# Altium PCB endpanel_back.PcbDoc
Units mm, origin at the board's own origin, x right, y up, seen from the top; angles counter-clockwise.
Board outline 86.5 x 29 mm, 2 copper layers (Top Layer, Bottom Layer); 1 components, 0 nets, 0 pads, 0 vias.
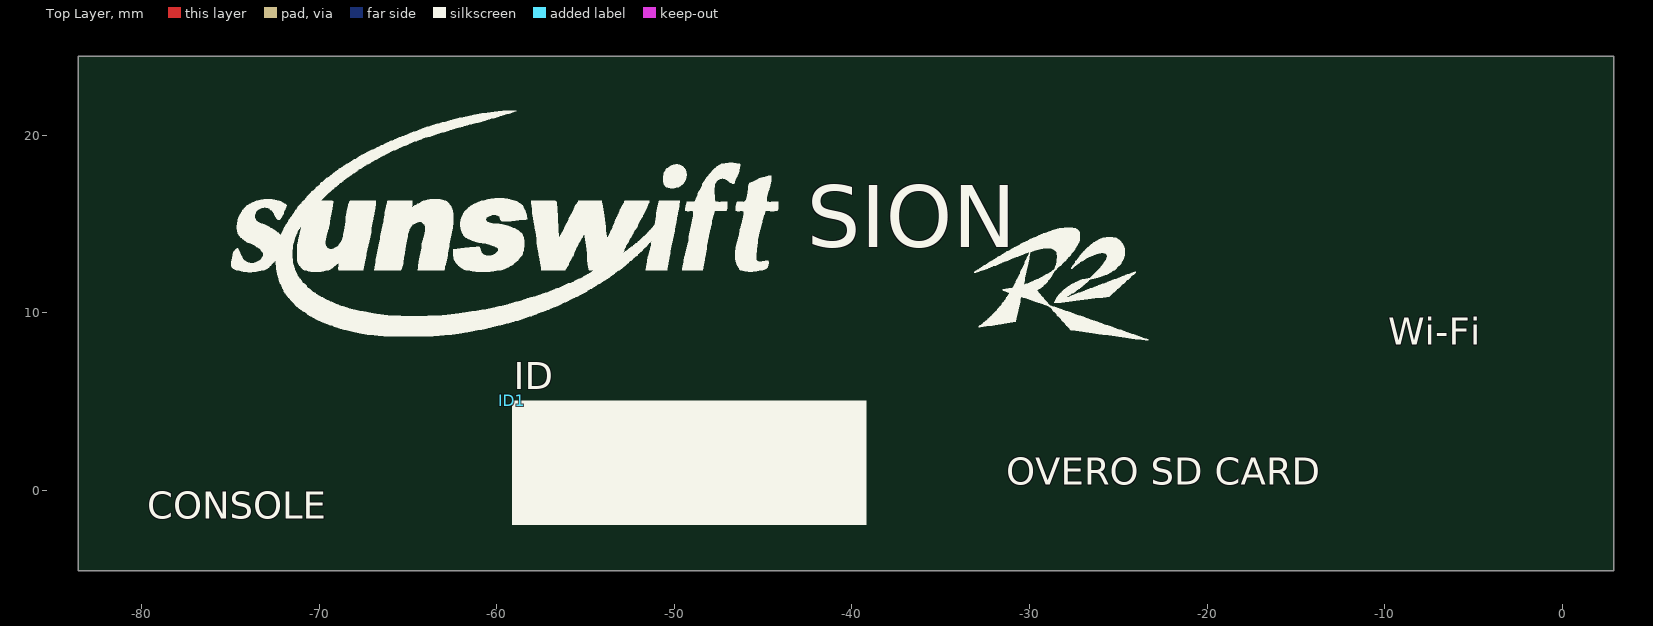
[diagram p0: Top Layer view]
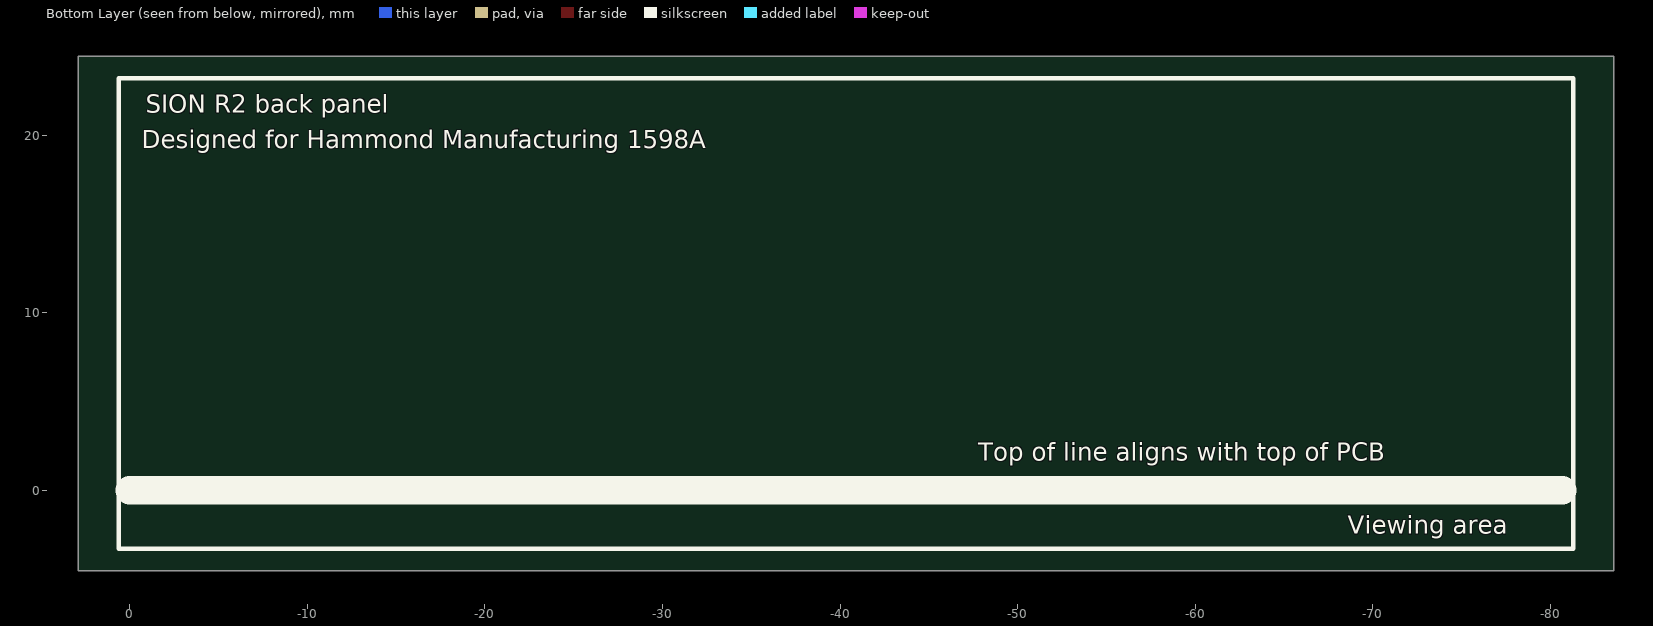
[diagram p1: Bottom Layer view, seen from below]

## Layer stack, top to bottom
Top Layer: signal copper 0.0356
Dielectric: dielectric 0.32, FR-4, Dk 4.8
Bottom Layer: signal copper 0.0356

## Board outline
-83.585,-4.55 2.915,-4.55 2.915,24.45 -83.585,24.45

## Design rules (kind name [scope] priority, off if disabled: settings)
Clearance [All] p1: gap=0.254
PolygonConnect [All] p1: connectstyle=Relief reliefconductorwidth=0.254 reliefentries=4 polygonreliefangle="90 Angle"
RoutingVias [All] p1: holewidth=0.711 width=1.27 viastyle="Through Hole" minholewidth=0.711 minwidth=1.27 maxholewidth=0.711 maxwidth=1.27
SilkscreenOverComponentPads [All] p1: minsilkscreentomaskgap=0.254
SolderMaskExpansion [All] p1: expansion=0.102
TestPointUsage [All] p1: valid=0 allowmultiple=FALSE
Testpoint [All] p1: side=15 testpointundercomponent=TRUE minsize=1.016 maxsize=2.54 preferedsize=1.524 minholesize=0 maxholesize=1.016 preferedholesize=0.813 testpointgrid=0.025 style=1023 order=0123456789
Width [All] p1: maxlimit=0.254 minlimit=0.254 preferedwidth=0.254
23 further rules are at their usual default settings.

## Components (designator, comment, footprint, x,y, rotation, side; value= is the part's Value field where it differs from the comment)
ID1 "IDBOX" IDBOX -59.14,5.044 r0 top

## Footprints (in the part's own frame and the unit in brackets; to place one, negate y for a bottom-side part, rotate by r counter-clockwise, add the part's x,y. Pads: shape width x height; smd on the part's side, far side on the other; paste and mask are expansions set on the pad)
IDBOX [mm] "Infobox"
  silkscreen extent 0,-7 19.95,0

## Nets (pads, with @x,y where several pads share a name; then routed paths per layer and width w, separated by ;. In a path a pad name is that pad's centre, name@x,y a point inside that pad or via, vN(x,y) a via of type N, cw(c..) or ccw(c..) an arc to the next point about the centre after c; other vN are vias at no path point)

## Silkscreen, mask and mechanical layers (free items; w line width, h text height)
Top Overlay:
  drawing of 3273 lines, arcs and shapes, not listed
  text "SION" at -42.557,12.521 h6
  text "Wi-Fi" at -9.8,8.2 h1.52
  text "OVERO SD CARD" at -31.3,0.3 h1.52
  text "CONSOLE" at -79.7,-1.6 h1.52
Bottom Overlay:
  lines w0.254: -81.285,-3.3 -81.285,23.2 0.615,23.2 0.615,-3.3 -81.285,-3.3
  lines w1.6: -80.67,0 0,0
  text "SION R2 back panel" at -0.885,21.25 h1
  text "Designed for Hammond Manufacturing 1598A" at -0.685,19.25 h1
  text "Top of line aligns with top of PCB" at -47.785,1.65 h1
  text "Viewing area" at -68.585,-2.45 h1
Mechanical 1:
  circle w0.254: c-6.6,14.1 r3.5
  lines w0.254: -83.585,-4.55 -83.585,24.45 2.915,24.45 2.915,-4.55 -83.585,-4.55 ; -79.206,0.8 -79.206,5.8 -70.206,5.8 -70.206,0.8 -79.206,0.8 ; -28.9,2.8 -14.9,2.8 -14.9,6.8 -28.9,6.8 -28.9,2.8
Mechanical 16:
  lines w0.127: -180.085,-35.29 -175.005,-35.29 ; -180.085,12.97 -175.005,12.97 ; -180.085,61.23 -175.005,61.23 ; -107.06,-83.55 -107.06,-78.47 ; -107.06,104.41 -107.06,109.49 ; -34.035,-83.55 -34.035,-78.47 ; -34.035,104.41 -34.035,109.49 ; -7.365,-70.85 106.935,-70.85 ; -7.365,-63.23 106.935,-63.23 ; -7.365,-55.61 30.735,-55.61 ; 30.735,-78.47 30.735,-63.23 30.735,-47.99 ; 38.99,-83.55 38.99,-78.47 ; 38.99,104.41 38.99,109.49 ; 84.075,-78.47 84.075,-63.23 ; 106.935,-35.29 112.015,-35.29 ; 106.935,12.97 112.015,12.97 ; 106.935,61.23 112.015,61.23 ; -7.365,-78.47 -7.365,-47.99 ; -7.365,-78.47 106.935,-78.47 ; -7.365,-78.47 -42.925,-78.47 -42.925,-47.99 -7.365,-47.99 ; -7.365,-47.99 30.735,-47.99 ; 30.735,-47.99 106.935,-47.99 106.935,-78.47 ; 106.935,-78.47 106.935,104.41 -175.005,104.41 -175.005,-78.47 106.935,-78.47 ; -180.085,-83.55 -180.085,109.49 112.015,109.49 112.015,-83.55 -180.085,-83.55
  text "1" at -143.839,106.061 h1.78
  text "2" at -71.195,106.061 h1.78
  text "3" at 1.957,106.061 h1.78
  text "4" at 74.855,106.061 h1.78
  text "A" at -178.18,83.049 h1.78
  text "A" at 108.84,83.049 h1.78
  text "B" at -178.18,34.992 h1.78
  text "B" at 108.84,34.992 h1.78
  text "C" at -178.18,-13.522 h1.78
  text "C" at 108.84,-13.522 h1.78
  text "ENGINEER:" at -6.095,-50.53 h1.14
  text "TITLE:" at 32.005,-50.53 h1.14
  text "Name" at -4.19,-53.832 h1.78
  text "Backplate" at 41.022,-57.515 h5.08
  text "PCB DESIGNER:" at -6.095,-58.023 h1.14
  text "Sunswift" at -40.131,-58.404 h5.08
  text "Name" at -4.19,-61.325 h1.78
  text "D" at -178.18,-61.528 h1.78
  text "D" at 108.84,-61.528 h1.78
  text "DATE:" at -6.095,-65.77 h1.14
  text "PART NO.:" at 32.005,-65.77 h1.14
  text "REV:" at 85.345,-65.77 h1.14
  text "Room 342" at -39.115,-68.31 h1.78
  text "Number" at 41.784,-68.691 h1.78
  text ".PRINT_DATE" at -4.825,-68.818 h1.78
  text "Rev" at 89.663,-68.945 h1.78
  text "EE Building" at -39.115,-70.85 h1.78
  text "UNSW, Sydney Australia" at -39.115,-73.39 h1.78
  text "FILE NAME:" at -6.095,-73.39 h1.14
  text "DWG NO:" at 32.005,-73.39 h1.14
  text "SCALE:" at 85.345,-73.39 h1.14
  text "2052" at -39.115,-75.93 h1.78
  text "Number" at 42.419,-75.93 h1.78
  text "Scale" at 90.806,-76.057 h1.78
  text ".PCB_FILE_NAME_NO_PATH" at -4.825,-76.438 h1.78
  text "1" at -143.839,-81.899 h1.78
  text "2" at -71.195,-81.899 h1.78
  text "3" at 1.957,-81.899 h1.78
  text "4" at 74.855,-81.899 h1.78

## Text inside footprints (layer, text, board x,y; h text height)
ID1: Top Overlay "ID" at -59.04,5.694 h1.52